# Altium PCB ESP-MONITOR_PCB.PcbDoc (part 2 of 2)
Units mm, origin at the board's own origin, x right, y up, seen from the top; angles counter-clockwise.
Board outline 62 x 40.01 mm, 2 copper layers (Top Layer, Bottom Layer); 71 components, 47 nets, 234 pads, 216 vias.
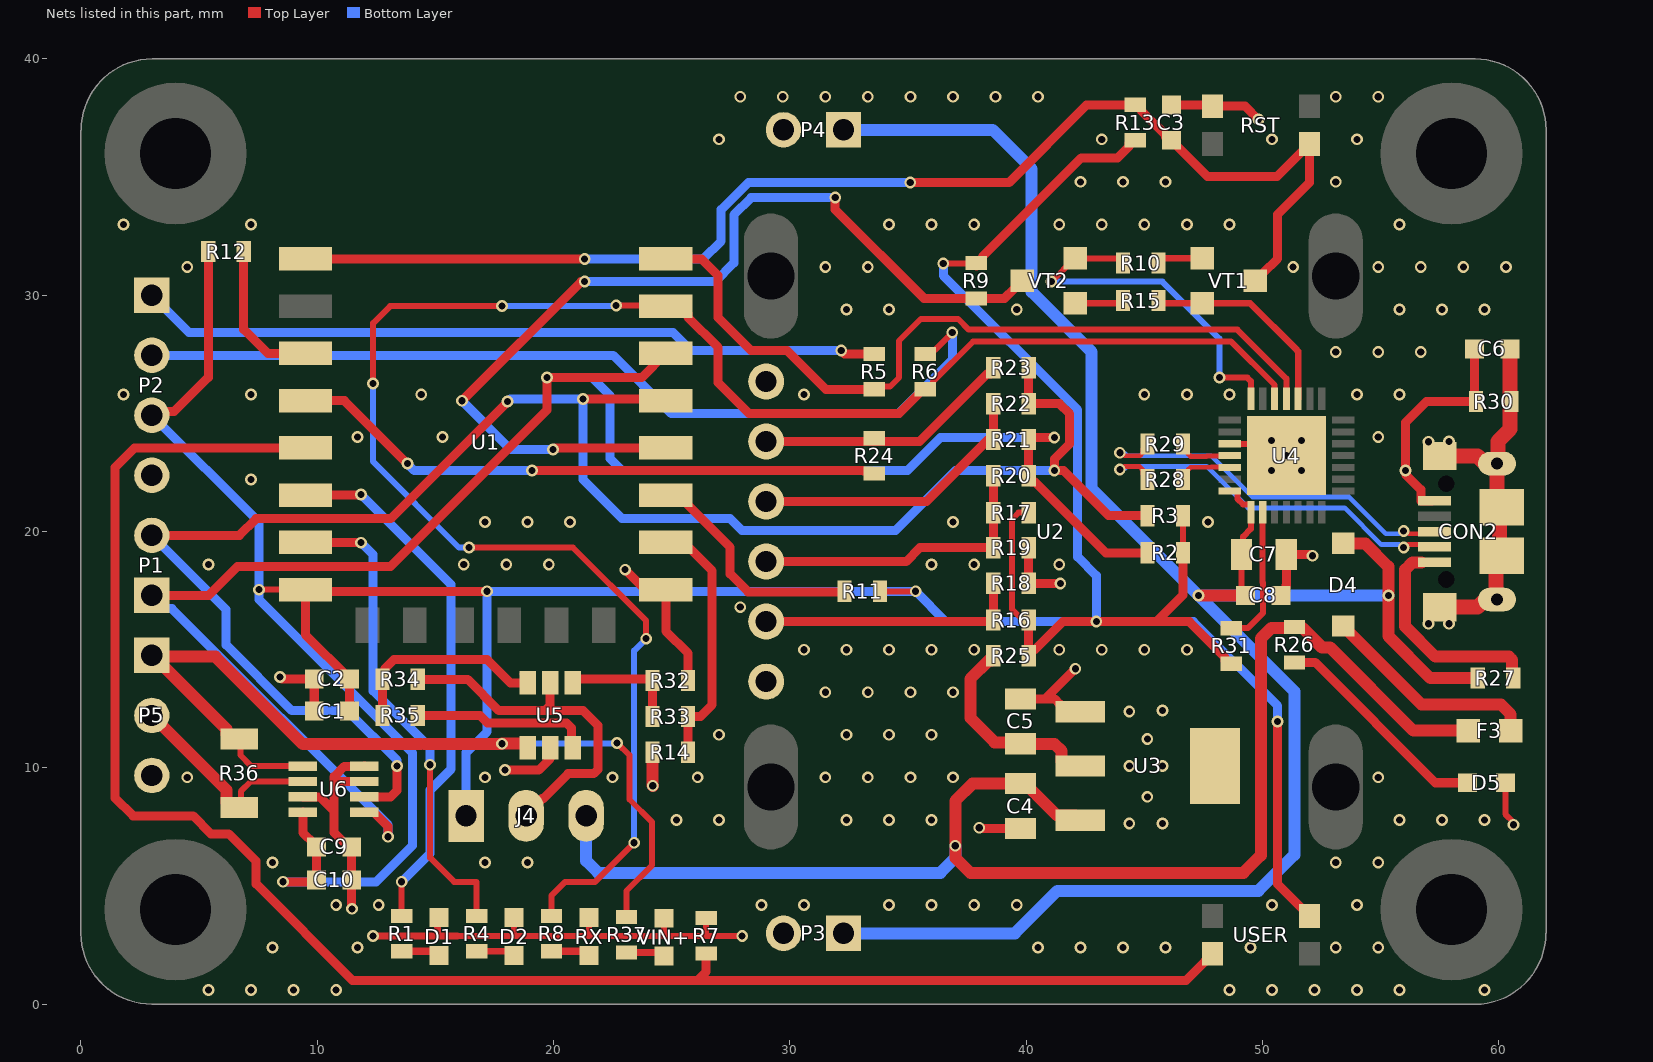
[diagram p2: the nets of this part, all layers, seen from the top]

## Part data (continued)
U5: "DIODES INC. - DMG6602SVT - MOSFET, NP CH, , 30V, 3.4, ATSOT23", Continuous Drain Current Id=3.4, Continuous Drain Current Id, P Channel=-2.8, Drain Source Voltage Vds=30, Drain Source Voltage Vds, P Channel=-30, Manufacturer="DIODES INC.", On Resistance Rds(on)=0.038, On Resistance Rds(on), P Channel=0.073, Operating Temperature Max=150, Operating Temperature Min=-55, Operating Temperature Range="-55°C to +150°C<!--FANDB--><div class=\"features-and-benefits-container\"><div class=\"features-and-benefits-description\"><span class=\"features-benefits-value\">The DMG6602SVT from Diode Inc is a surface mount complementary pair enhancement mode MOSFET in TSOT-26 package. This MOSFET features low input capacitance, fast switching speed and low input/output leakage, designed to minimize the onstate resistance and maintain superior switching performance, making it ideal for high efficiency power management applications and backlighting.</span></div><div class=\"features-and-benefits-list\"><ul class=\"features-and-benefits-list-list\"><li class=\"features-and-benefits-list-item\">Automotive grade AEC-Q101 qualified</li><li class=\"features-and-benefits-list-item\">UL recognized</li><li class=\"features-and-benefits-list-item\">Drain to source voltage (Vds) of 30V</li><li class=\"features-and-benefits-list-item\">Gate to source voltage (Vgs) of ±20V</li><li class=\"features-and-benefits-list-item\">Continuous drain current of 3.4A</li><li class=\"features-and-benefits-list-item\">Power dissipation (Pd) of 1.27W</li><li class=\"features-and-benefits-list-item\">Operating temperature range -55°C to 150°C</li><li class=\"features-and-benefits-list-item\">Low on state resistance of 38mohm at Vgs of 10", Power Dissipation Pd=1.12, Rds(on) Test Voltage Vgs=10, Supplier Part Number 1=2061522, Threshold Voltage Vgs=1, Transistor Case Style=TSOT-26, Automotive Qualification Standard=-, ComponentLink1Description=http://www.farnell.com/datasheets/1915929.pdf, ComponentLink1URL=http://www.farnell.com/datasheets/1915929.pdf, Continuous Drain Current Id, N Channel=3.4, Drain Source Voltage Vds, N Channel=30, Manufacturer Part Number=DMG6602SVT, Module Configuration=Dual, MSL=-, No. of Pins=6, On Resistance Rds(on), N Channel=0.038, Pricing 1="1=0.363, 25=0.339, 100=0.169, 250=0.166, 500=0.108, 1000=0.0809, 2000=0.0793, 6000=0.0777 (GBP)", Product Range=-, RoHS=YES, Stock 1=4881, Supplier 1=Farnell, SVHC="No SVHC (17-Dec-2015)", Transistor Polarity="N and P Channel"
U6: "26V, Bi-Directional, High-Side, I2C Out Current/Power Monitor 8-SOT-23 -40 to 125", Case/Package=SOT-23-8, Input Offset Voltage (Vos)=100uV, Manufacturer="Texas Instruments", Max Input Voltage=26V, Max Operating Temperature=125°C, Max Supply Current=5mA, Max Supply Voltage=5.5V, Min Input Voltage=0uV, Min Operating Temperature=-40°C, Min Supply Voltage=3V, Nominal Supply Current=700uA, Operating Supply Current=1mA, Output Current=10mA, Package Quantity=3000, Supplier Part Number 1=2295989, Accuracy=1%, Bandwidth=3.4MHz, Common Mode Rejection Ratio=100dB, ComponentLink1Description=http://www.ti.com/lit/ds/symlink/ina219.pdf?src-supplier=Farnell, ComponentLink1URL=http://www.ti.com/lit/ds/symlink/ina219.pdf?src-supplier=Farnell, ComponentLink2Description=http://www.ti.com/lit/ds/symlink/ina219.pdf?src-supplier=Digi-Key, ComponentLink2URL=http://www.ti.com/lit/ds/symlink/ina219.pdf?src-supplier=Digi-Key, ComponentLink3Description=http://www.farnell.com/datasheets/1725057.pdf?src-supplier=Element14, ComponentLink3URL=http://www.farnell.com/datasheets/1725057.pdf?src-supplier=Element14, ComponentLink4Description=http://www.ti.com/general/docs/lit/getliterature.tsp?genericPartNumber=INA219&&fileType=pdf&src-supplier=Element14, ComponentLink4URL=http://www.ti.com/general/docs/lit/getliterature.tsp?genericPartNumber=INA219&&fileType=pdf&src-supplier=Element14, ComponentLink5Description=http://www.ti.com/general/docs/lit/getliterature.tsp?genericPartNumber=INA219&&fileType=pdf&src-supplier=Avnet, ComponentLink5URL=http://www.ti.com/general/docs/lit/getliterature.tsp?genericPartNumber=INA219&&fileType=pdf&src-supplier=Avnet, ComponentLink6Description=https://www.verical.com/server-webapp/html/getDatasheet?partID=327029&src-supplier=Verical, ComponentLink6URL=https://www.verical.com/server-webapp/html/getDatasheet?partID=327029&src-supplier=Verical, ComponentLink7Description=https://octopart.com/click/track?ak=2673a2b2&ct=datasheets&sig=0ce0873&at=physicalpart&sid=370&ppid=8600986&hlid=24884001&src-supplier=TI+store, ComponentLink7URL=https://octopart.com/click/track?ak=2673a2b2&ct=datasheets&sig=0ce0873&at=physicalpart&sid=370&ppid=8600986&hlid=24884001&src-supplier=TI+store, ComponentLink8Description=http://datasheet.octopart.com/INA219AIDCNR-Texas-Instruments-datasheet-10258484.pdf?src-supplier=TI+store, ComponentLink8URL=http://datasheet.octopart.com/INA219AIDCNR-Texas-Instruments-datasheet-10258484.pdf?src-supplier=TI+store, ComponentLink9Description=http://datasheet.octopart.com/INA219AIDCNR-Texas-Instruments-datasheet-10383171.pdf?src-supplier=TI+store, ComponentLink9URL=http://datasheet.octopart.com/INA219AIDCNR-Texas-Instruments-datasheet-10383171.pdf?src-supplier=TI+store, ComponentLink10Description=http://sigma.octopart.com/49252122/technical_drawing/Texas-Instruments-INA219AIDCNR.pdf?src-supplier=TI+store, ComponentLink10URL=http://sigma.octopart.com/49252122/technical_drawing/Texas-Instruments-INA219AIDCNR.pdf?src-supplier=TI+store, ComponentLink11Description=http://datasheet.octopart.com/INA219AIDCNR-Texas-Instruments-datasheet-11538655.pdf?src-supplier=Future+Electronics, ComponentLink11URL=http://datasheet.octopart.com/INA219AIDCNR-Texas-Instruments-datasheet-11538655.pdf?src-supplier=Future+Electronics, ComponentLink12Description=http://datasheet.octopart.com/INA219AIDCNR-Texas-Instruments-datasheet-102489495.pdf?src-supplier=Farnell, ComponentLink12URL=http://datasheet.octopart.com/INA219AIDCNR-Texas-Instruments-datasheet-102489495.pdf?src-supplier=Farnell, ComponentLink13Description=http://datasheet.octopart.com/INA219AIDCNR-Texas-Instruments-datasheet-24897021.pdf?src-supplier=Element14, ComponentLink13URL=http://datasheet.octopart.com/INA219AIDCNR-Texas-Instruments-datasheet-24897021.pdf?src-supplier=Element14, ComponentLink14Description=http://datasheet.octopart.com/INA219AIDCNR-Texas-Instruments-datasheet-14155040.pdf?src-supplier=IIIC, ComponentLink14URL=http://datasheet.octopart.com/INA219AIDCNR-Texas-Instruments-datasheet-14155040.pdf?src-supplier=IIIC, ComponentLink15Description=http://datasheet.octopart.com/INA219AIDCNR.-Texas-Instruments-datasheet-62277359.pdf?src-supplier=Element14, ComponentLink15URL=http://datasheet.octopart.com/INA219AIDCNR.-Texas-Instruments-datasheet-62277359.pdf?src-supplier=Element14, Contact Plating=Gold, Features=I²C, Height=1.3mm, Lead Free="Lead Free", Length=3mm, Manufacturer Part Number=INA219AIDCNR, Number of Amplifiers=1, Number of Pins=8, Output Current per Channel=10mA, Output Type=Digital, Packaging="Tape and Reel", Pricing 1="1 = 1,75000, 25 = 1,54000, 50 = 1,39000, 100 = 1,23000, 250 = 1,16000, 500 = 1,08000, 1000 = 0,89900, 2500 = 0,80300 (EUR)", Quiescent Current=700uA, Radiation Hardening=No, REACH SVHC="No SVHC", Stock 1=13730, Supplier 1=Farnell, Weight=0.001411oz, Width=1.75mm
VT1 VT2: library part SMT_TRIODE_NPN, "Surface mount NPN transistor, package SOT-23"

## Free pads (board coordinates)
  round 6 hole 3: ""(4,4) ""(4,36) ""(58,4) ""(58,36)

## Via types
v1: diameter 0.5, hole 0.3, Top Layer to Bottom Layer, tented both sides, 211 vias
v2: diameter 0.5, hole 0.3, Top Layer to Bottom Layer, 5 vias

## Nets (pads, with @x,y where several pads share a name; then routed paths per layer and width w, separated by ;. In a path a pad name is that pad's centre, name@x,y a point inside that pad or via, vN(x,y) a via of type N, cw(c..) or ccw(c..) an arc to the next point about the centre after c; other vN are vias at no path point)
D_N: R28.1 U4.5 | length 2.3
  Top Layer w0.203: R28.1@46.64,22.202 46.839,22.401 46.839,22.605 46.958,22.724 47.817,22.724 47.83,22.737 48.589,22.737 U4.5@48.61,22.715
D_P: R29.1 U4.4 | length 2.3
  Top Layer w0.203: R29.1@46.64,23.702 46.839,23.504 46.839,23.3 46.958,23.181 47.628,23.181 47.641,23.194 48.589,23.194 U4.4@48.61,23.215
DUSB_N: CON2.2 R28.2 | length 16.8
  Top Layer w0.203: v1(43.963,22.632) 44.043,22.632 44.166,22.755 44.792,22.755 44.942,22.605 44.942,22.401 R28.2@45.14,22.202 ; R28.2@45.091,22.153 R28.2@45.091,22.173 ; v1@56.179,19.446 57.176,19.446 CON2.2@57.78,19.446
  Bottom Layer w0.203: v1(43.963,22.632) 44.02,22.689 44.202,22.689 44.268,22.755 47.636,22.755 49.391,21 53.475,21 55.029,19.446 55.773,19.446 55.896,19.323 v1(55.976,19.323)
  Bottom Layer w0.305: v1@55.976,19.35 v1@56.05,19.35
DUSB_P: CON2.3 R29.2 | length 16.6
  Top Layer w0.203: v1(43.963,23.335) 44.043,23.335 44.166,23.212 44.823,23.212 44.942,23.331 44.942,23.504 R29.2@45.14,23.702 ; v1@56.179,19.904 57.176,19.904 CON2.3@57.78,19.904
  Top Layer w0.381: R29.2@45.127,23.715 R29.2@45.14,23.702
  Bottom Layer w0.203: v1(43.963,23.335) 44.02,23.278 44.202,23.278 44.268,23.212 47.826,23.212 49.581,21.457 53.665,21.457 55.218,19.904 55.773,19.904 55.896,20.027 v1(55.976,20.027)
EN: R12.2 U1.3 | length 6.3
  Top Layer w0.381: R12.2@6.889,31.849 6.889,28.559 7.908,27.54 U1.3@9.5,27.54
FET_OUT: P5.1 R36.1 R37.2 U5.4 U6.1 | length 39.5
  Top Layer w0.254: R36.1@6.743,11.181 6.743,10.544 7.213,10.074 U6.1@9.39,10.074 ; 14.394,11.005 14.537,11.005 ; v1(22.681,11.053) 22.681,11.068 23.214,10.534 23.214,8.663 24.173,7.704 24.173,5.88 23.087,4.794 R37.2@23.087,3.685
  Top Layer w0.508: R36.1@6.698,11.226 6.348,11.226 6.152,11.422 6.152,11.643 3.091,14.704 5.687,14.704 9.386,11.005 14.394,11.005 ; 14.537,11.005 17.807,11.005 v1(17.823,11.021) 18.809,11.021 18.809,11.005 18.905,10.909 U5.4@18.905,10.845
  Bottom Layer w0.254: v1(17.823,11.021) 17.839,11.037 22.665,11.037 v1(22.681,11.053)
GND: C1.1 C2.1 C3.1 C4.1 C5.1 C6.1 C7.1 C8.1 C9.1 C10.1 CON2.5 D1.1 D2.1 D5.1 P2.4 P3.2 P4.2 P5.3 R7.1 R14.1 R18.1 R19.1 R30.1 R32.1 RST.4 RX.1 U1.15 U2.1 U2.6 U3.1 U4.3 U4.29 U5.5 U6.3 U6.7 U6.8 VIN+.1 | length 73.2
  Top Layer w0.254: 15.934,2.885 18.181,2.885 ; D2.1@18.33,3.66 18.324,3.654 18.324,3.028 18.181,2.885 ; 21.502,2.885 18.181,2.885 ; 21.502,2.922 RX.1@21.502,3.66 ; 21.633,2.885 24.673,2.885 ; VIN+.1@24.673,3.635 24.673,2.885 ; R7.1@26.459,3.643 26.459,2.885 ; v1(27.983,2.885) 26.459,2.885 ; U4.3@48.61,23.715 50.51,23.715 v2(51.01,23.215) ; D5.1@60.279,9.37 60.279,8.039 60.622,7.696 v1(60.622,7.592) ; 24.673,2.885 26.459,2.885
  Top Layer w0.3: v1(12.365,2.89) 14.169,2.89 14.174,2.885 14.982,2.885 ; D1.1@15.159,3.66 15.082,3.584 15.082,2.986 14.982,2.885 ; 15.934,2.885 14.982,2.885
  Top Layer w0.381: v1(8.425,13.844) 8.501,13.768 C2.1@9.873,13.768 C1.1@9.873,12.401 ; U6.3@9.39,8.774 10.097,8.774 10.711,8.16 ; C9.1@11.442,6.532 10.711,7.264 10.711,8.16 ; C9.1@11.459,6.659 C10.1@11.459,5.262 11.459,4.05 v1(11.473,4.036) ; U6.7@11.981,9.414 U6.7@11.99,9.424 10.765,9.424 10.711,9.37 ; U6.8@11.99,10.074 11.982,10.065 11.152,10.065 10.711,9.624 10.711,9.37 ; v1(17.95,9.903) 19.372,9.903 19.855,10.386 U5.5@19.855,10.845 ; v1(23.03,18.387) 23.877,17.54 U1.15@24.75,17.54 24.75,15.789 25.69,14.849 R32.1@25.69,13.694 ; v1(38.016,7.465) 38.046,7.435 C4.1@39.763,7.435 ; C5.1@39.763,12.918 40.802,12.918 ; R19.1@40.108,19.318 R18.1@40.108,17.807 v1(41.445,17.807) ; v1(42.08,14.196) 40.802,12.918 ; U3.1@42.289,12.38 41.689,12.38 41.43,12.639 41.43,12.695 41.207,12.918 40.802,12.918 ; C3.1@46.144,38.06 47.826,38.06 RST.4@47.886,38 49.264,38 v1(49.827,37.437) ; C8.1@50.786,17.3 50.995,17.51 50.995,17.717 51.011,17.733 C7.1@51.011,19.032 52.056,19.032 v1(52.113,18.975) ; CON2.5@57.176,21.3 56.713,21.3 56.703,21.31 56.703,21.773 56.073,22.403 56.073,22.555 v1(56.05,22.578) 56.05,24.61 56.94,25.5 R30.1@59.04,25.5 58.977,25.564 C6.1@58.977,27.728 ; 10.711,8.16 10.711,9.37
  Top Layer w0.508: R14.1@24.19,10.665 24.19,9.251 v1(24.198,9.243)
  other v1: 5.4,0.6 7.2,0.6 9,0.6 10.8,0.6 48.6,0.6 50.4,0.6 52.2,0.6 54,0.6 55.8,0.6 59.4,0.6 8.1,2.4 11.7,2.4 40.5,2.4 42.3,2.4 44.1,2.4 45.9,2.4 49.5,2.4 53.1,2.4 54.9,2.4 10.8,4.2 12.6,4.2 28.8,4.2 30.6,4.2 34.2,4.2 36,4.2 37.8,4.2 39.6,4.2 50.4,4.2 54,4.2 8.1,6 17.1,6 18.9,6 53.1,6 54.9,6 25.2,7.8 27,7.8 32.4,7.8 34.2,7.8 36,7.8 55.8,7.8 57.6,7.8 59.4,7.8 4.5,9.6 17.1,9.6 22.5,9.6 26.1,9.6 31.5,9.6 33.3,9.6 35.1,9.6 36.9,9.6 54.9,9.6 27,11.4 32.4,11.4 34.2,11.4 36,11.4 31.5,13.2 33.3,13.2 35.1,13.2 36.9,13.2 30.6,15 32.4,15 34.2,15 36,15 37.8,15 41.4,15 43.2,15 45,15 46.8,15 27.9,16.8 5.4,18.6 16.2,18.6 18,18.6 19.8,18.6 36,18.6 37.8,18.6 41.4,18.6 17.1,20.4 18.9,20.4 20.7,20.4 36.9,20.4 47.7,20.4 7.2,22.2 11.7,24 15.3,24 54.9,24 1.8,25.8 7.2,25.8 14.4,25.8 30.6,25.8 45,25.8 46.8,25.8 48.6,25.8 54,25.8 55.8,25.8 53.1,27.6 54.9,27.6 56.7,27.6 32.4,29.4 34.2,29.4 39.6,29.4 55.8,29.4 57.6,29.4 59.4,29.4 4.5,31.2 31.5,31.2 33.3,31.2 51.3,31.2 54.9,31.2 56.7,31.2 58.5,31.2 60.3,31.2 1.8,33 7.2,33 34.2,33 36,33 37.8,33 41.4,33 43.2,33 45,33 46.8,33 48.6,33 55.8,33 42.3,34.8 44.1,34.8 45.9,34.8 53.1,34.8 27,36.6 43.2,36.6 50.4,36.6 54,36.6 27.9,38.4 29.7,38.4 31.5,38.4 33.3,38.4 35.1,38.4 36.9,38.4 38.7,38.4 40.5,38.4 53.1,38.4 54.9,38.4
  other v2: 50.375,22.58 51.645,22.58 50.375,23.85 51.645,23.85
GPIO0: R9.2 U1.18 VT2.3 | length 41
  Top Layer w0.381: v1(16.125,25.535) 21.169,30.579 v1(21.316,30.579) ; v1(19.982,23.467) 20.055,23.54 U1.18@24.75,23.54 U1.18@25.431,23.54 ; v1(31.92,34.135) 31.92,33.627 35.684,29.863 R9.2@37.889,29.863 39.078,29.863 39.519,30.303 39.519,30.328 39.803,30.613 VT2.3@39.828,30.613
  Bottom Layer w0.381: v1(16.125,25.535) 18.193,23.467 v1(19.982,23.467) ; v1(21.316,30.579) 26.84,30.579 27.629,31.368 27.629,33.399 28.364,34.135 v1(31.92,34.135)
GPIO2: R11.2 U1.17 | length 9.9
  Top Layer w0.381: U1.17@24.75,21.54 25.06,21.23 25.571,21.23 27.475,19.327 27.475,18.209 28.237,17.447 R11.2@32.25,17.447
GPIO12: R1.1 U1.6 | length 22.6
  Top Layer w0.254: R1.1@13.573,3.737 v1(13.573,5.179)
  Top Layer w0.381: U1.6@9.5,21.54 11.832,21.54 v1(11.854,21.562)
  Bottom Layer w0.381: v1(11.854,21.562) 15.664,17.752 15.664,9.952 14.775,9.063 14.775,6.381 v1(13.573,5.179)
GPIO13: R4.1 U1.7 | length 20.7
  Top Layer w0.254: v1(14.775,10.132) 14.775,6.195 15.791,5.179 16.744,5.179 R4.1@16.744,3.737
  Top Layer w0.381: U1.7@9.5,19.54 9.51,19.53 v1(11.854,19.53)
  Bottom Layer w0.381: v1(11.854,19.53) 12.365,19.019 12.365,13.257 14.775,10.847 v1(14.775,10.132)
GPIO14: R7.2 U1.5 USER.1 | length 74.4
  Top Layer w0.381: U1.5@9.5,23.54 2.275,23.54 1.44,22.705 1.44,8.735 2.207,7.968 4.742,7.968 5.499,7.211 6.254,7.211 7.409,6.056 7.409,5.092 11.501,1 26.078,1 ; R7.2@26.459,2.143 26.459,1.381 26.078,1 ; USER.1@47.886,2.131 47.886,2.081 47.626,1.821 47.576,1.821 46.755,1 26.078,1
GPIO15: R14.2 R33.1 U1.16 | length 10.9
  Top Layer w0.381: U1.16@24.75,19.54 25.509,19.54 26.713,18.336 26.713,12.672 26.211,12.17 R33.1@25.69,12.17 R14.2@25.69,10.665
NetC5_2: C5.2 R25.1 U3.2 | length 8.9
  Top Layer w0.508: R25.1@38.608,14.741 38.608,14.591 38.562,14.545 38.412,14.545 37.635,13.768 37.635,12.115 38.667,11.084 39.698,11.084 C5.2@39.763,11.018 41.196,11.018 41.493,10.721 41.493,10.276 41.689,10.08 U3.2@42.289,10.08
  other v1: 44.366,7.648 45.763,7.648 45.127,8.774 44.366,10.08 45.763,10.08 45.127,11.226 44.366,12.38 45.763,12.424
NetC6_2: C6.2 CON2.6 CON2.7 CON2.8 CON2.9 CON2.10 CON2.11 R30.2 | length 16.3
  Top Layer w0.635: CON2.6@57.401,16.8 59.102,16.8 59.427,17.125 59.826,17.125 59.889,17.189 59.889,18.838 60.026,18.975 60.026,21.025 59.926,21.125 CON2.9@59.926,22.775 ; CON2.7@57.401,23.2 59.102,23.2 59.527,22.775 CON2.9@59.926,22.775 ; C6.2@60.477,27.728 60.477,25.5 60.477,24.33 59.966,23.819 59.966,23.015 59.826,22.875 CON2.9@59.926,22.775
  other v1: 57.022,16.1 57.9,16.1 57.022,23.8 57.9,23.81
NetCON2_1: CON2.1 R27.2 | length 9.1
  Top Layer w0.508: CON2.1@56.73,18.693 56.346,18.693 56.037,18.384 56.037,15.985 57.318,14.704 58.617,14.704 58.621,14.707 60.424,14.707 60.424,14.704 60.564,14.564 60.564,13.846 R27.2@60.61,13.8
NetD1_2: D1.2 R1.2 | length 1.7
  Top Layer w0.305: R1.2@13.573,2.237 14.982,2.237 D1.2@15.159,2.06
NetD2_2: D2.2 R4.2 | length 1.7
  Top Layer w0.279: R4.2@16.744,2.237 18.153,2.237 D2.2@18.33,2.06
NetD4_1: D4.1 F3.1 | length 9.3
  Top Layer w0.508: D4.1@53.41,16.002 53.435,16.002 53.631,15.806 53.631,15.781 56.74,12.672 60.097,12.672 60.506,12.264 F3.1@60.506,11.578
NetD5_2: D5.2 R26.1 | length 9.4
  Top Layer w0.381: R26.1@51.351,14.462 52.228,14.462 57.32,9.37 D5.2@58.679,9.37
NetJ4_2: J4.2 R34.1 U5.2 | length 15.4
  Top Layer w0.381: R34.1@14.255,13.746 16.368,13.746 17.69,12.424 19.632,12.424 ; J4.2@18.839,7.973 18.839,8.02 19.52,8.701 19.567,8.701 20.617,9.751 21.7,9.751 21.887,9.938 21.887,11.792 21.254,12.424 19.632,12.424 ; U5.2@19.855,13.595 19.855,12.647 19.632,12.424
NetP2_1: P2.1 R5.2 | length 31.8
  Top Layer w0.381: v1@32.313,27.519 v1(32.174,27.658) 32.206,27.658 32.345,27.519 R5.2@33.571,27.519
  Bottom Layer w0.381: P2.1@3,30 4.58,28.42 25.062,28.42 25.824,27.658 v1(32.174,27.658)
NetP2_2: P2.2 R6.2 | length 38.5
  Top Layer w0.254: R6.2@35.73,27.519 35.903,27.692 36.145,27.692 v1(36.873,28.42)
  Bottom Layer w0.381: P2.2@3,27.46 22.522,27.46 24.991,24.991 34.587,24.991 36.873,27.277 v1(36.873,28.42)
NetP5_2: P5.2 R36.2 U6.2 | length 9.1
  Top Layer w0.254: R36.2@6.698,8.326 6.762,8.391 6.762,9.009 7.178,9.424 U6.2@9.39,9.424
  Top Layer w0.508: P5.2@3,12.22 6.152,9.068 6.152,8.522 6.348,8.326 R36.2@6.698,8.326
NetR8_1: R8.1 RX.2 | length 1.7
  Top Layer w0.305: R8.1@19.916,2.237 RX.2@21.325,2.237
  Top Layer w0.381: RX.2@21.325,2.237 RX.2@21.502,2.06
NetR10_1: R10.1 VT1.1 | length 2
  Top Layer w0.279: R10.1@45.599,31.365 45.599,31.402 45.76,31.563 VT1.1@47.449,31.563
NetR10_2: R10.2 U4.28 VT2.2 | length 15.4
  Top Layer w0.254: v1(41.064,30.579) 41.07,30.579 42.053,31.563 VT2.2@42.078,31.563 43.926,31.563 44.099,31.39 R10.2@44.099,31.365 ; v1(48.176,26.515) 49.36,26.515 49.51,26.365 U4.28@49.51,25.615
  Bottom Layer w0.254: v1(41.064,30.579) 45.763,30.579 48.176,28.166 v1(48.176,26.515)
NetR15_1: R15.1 VT2.1 | length 2.1
  Top Layer w0.279: VT2.1@42.078,29.663 43.988,29.663 R15.1@44.099,29.774
NetR15_2: R15.2 U4.24 VT1.2 | length 8.8
  Top Layer w0.279: R15.2@45.599,29.774 45.71,29.663 VT1.2@47.449,29.663 49.473,29.663 51.414,27.721 51.51,27.626 U4.24@51.51,25.615
NetR16_2: R16.2 R18.2 U2.2 | length 11.2
  Top Layer w0.381: U2.2@29,16.19 38.542,16.19 R16.2@38.608,16.256 R18.2@38.608,17.807
NetR17_2: R17.2 R19.2 R20.2 U2.3 | length 12.9
  Top Layer w0.381: U2.3@29,18.73 34.918,18.73 35.506,19.318 R19.2@38.608,19.318 R17.2@38.608,20.8 R20.2@38.608,22.363
NetR21_2: R21.2 R22.2 U2.4 | length 12.2
  Top Layer w0.381: U2.4@29,21.27 35.776,21.27 38.402,23.896 R21.2@38.608,23.896 R22.2@38.608,25.411
NetR23_2: R23.2 R24.2 U2.5 | length 11.3
  Top Layer w0.381: U2.5@29,23.81 33.571,23.81 35.483,23.81 38.349,26.676 38.499,26.676 38.608,26.785 R23.2@38.608,26.935 38.608,27.085 R23.2@38.718,27.195
NetR31_2: R31.2 U4.9 | length 5.9
  Top Layer w0.254: R31.2@48.684,15.908 49.38,15.908 50.016,16.544 50.016,17.837 50.01,17.842 U4.9@50.01,20.815
NetR32_2: R32.2 R33.2 U5.1 | length 4.9
  Top Layer w0.381: U5.1@20.805,13.755 24.13,13.755 R32.2@24.19,13.694 R33.2@24.19,12.17
NetR34_2: R34.2 R35.2 U5.3 | length 9.1
  Top Layer w0.279: U5.3@18.695,13.955 18.905,13.745 U5.3@18.905,13.595
  Top Layer w0.381: R35.2@12.755,12.22 R34.2@12.755,13.746 12.864,13.856 12.864,14.202 13.252,14.59 17.175,14.59 18.17,13.595 U5.3@18.905,13.595
NetR35_1: R35.1 U5.6 | length 7.6
  Top Layer w0.381: R35.1@14.255,12.22 16.878,12.22 17.207,11.891 20.557,11.891 20.756,11.692 20.756,10.894 U5.6@20.805,10.845
NetR37_1: R37.1 VIN+.2 | length 1.6
  Top Layer w0.279: R37.1@23.087,2.185 24.523,2.185 VIN+.2@24.673,2.035
nRST: C3.2 R13.2 RST.2 U1.1 VT1.3 | length 54.2
  Top Layer w0.381: U1.1@9.5,31.54 v1(21.316,31.54) ; v1(35.095,34.77) 39.273,34.77 42.563,38.06 R13.2@44.62,38.06 ; R13.2@44.88,37.8 45.896,36.784 45.896,36.706 C3.2@46.106,36.496 ; C3.2@46.144,36.56 47.68,35.024 50.61,35.024 51.676,36.09 51.726,36.09 RST.2@51.986,36.35 ; VT1.3@49.699,30.613 49.724,30.613 50.008,30.897 50.008,30.922 50.638,31.552 50.638,33.422 51.986,34.77 RST.2@51.986,36.35 ; RST.2@51.986,36.4 RST.2@51.986,36.35
  Bottom Layer w0.381: v1(21.316,31.54) 26.341,31.54 27.095,32.294 27.095,33.62 28.254,34.779 35.086,34.779 v1(35.095,34.77)
RES: R24.1 U1.4 | length 25.4
  Top Layer w0.381: U1.4@9.5,25.54 11.148,25.54 v1(13.813,22.875) ; v1(19.093,22.58) 23.536,22.58 23.538,22.578 33.088,22.578 33.106,22.56 33.462,22.56 R24.1@33.571,22.451
  Bottom Layer w0.381: v1(13.813,22.875) 14.107,22.58 v1(19.093,22.58)
RXD0: R6.1 R8.2 U1.21 U4.26 | length 78.9
  Top Layer w0.254: v1(12.365,26.261) 12.365,28.821 13.084,29.54 v1(17.823,29.54) ; v1(16.42,19.327) 20.82,19.327 23.919,16.228 v1(23.919,15.466) ; R8.2@19.916,3.737 19.916,4.605 20.49,5.179 21.76,5.179 v1(23.411,6.83) ; v1(22.649,29.563) 24.727,29.563 U1.21@24.75,29.54 ; R6.1@35.73,26.019 35.88,26.019 36.053,26.192 36.053,26.342 37.75,28.039 48.678,28.039 50.51,26.207 U4.26@50.51,25.615
  Top Layer w0.381: U1.21@24.75,29.54 25.375,29.54 25.685,29.23 25.685,29.074 26.967,27.791 26.967,26.302 28.278,24.991 34.617,24.991 R6.1@35.527,25.901
  Bottom Layer w0.254: v1(12.365,26.261) 12.362,26.258 12.362,22.959 15.994,19.327 v1(16.42,19.327) ; v1(17.823,29.54) 22.626,29.54 v1(22.649,29.563) ; v1(23.411,6.83) 23.411,14.958 v1(23.919,15.466)
SCL: P1.1 R2.1 R20.1 R21.1 U1.20 U6.5 | length 77.4
  Top Layer w0.381: P1.1@3,17.3 5.402,17.3 6.616,18.514 13.094,18.514 19.728,25.148 v1(19.728,26.515) 23.725,26.515 U1.20@24.75,27.54 ; U6.5@11.99,8.124 12.39,8.124 12.997,7.517 v1(12.997,7.084) ; v1(41.191,23.975) 40.279,23.975 40.154,23.85 R21.1@40.108,23.896 R20.1@40.108,22.363 40.108,22.213 40.218,22.104 40.368,22.104 43.37,19.102 R2.1@45.14,19.102
  Bottom Layer w0.381: P1.1@3,17.3 3.56,16.741 3.848,16.741 12.997,7.592 v1(12.997,7.084) ; v1(19.728,26.515) 21.633,26.515 22.395,25.753 22.395,23.088 22.903,22.58 34.97,22.58 36.365,23.975 v1(41.191,23.975)
SDA: P1.2 R3.1 R22.1 R23.1 U1.19 U6.6 | length 78.2
  Top Layer w0.381: P1.2@3,19.84 6.703,19.84 7.409,20.546 13.101,20.546 v1(18.054,25.499) ; U6.6@11.99,8.774 13.107,8.774 13.378,9.045 v1(13.378,10.08) ; v1(21.252,25.615) 24.675,25.615 U1.19@24.75,25.54 ; R23.1@40.108,26.935 R22.1@40.108,25.411 41.406,25.411 41.835,24.982 41.835,23.708 41.191,23.065 v1(41.191,22.578) 41.587,22.578 43.492,20.673 R3.1@45.14,20.673
  Bottom Layer w0.381: P1.2@3,19.84 6.139,16.701 6.139,15.204 8.925,12.418 11.275,12.418 13.378,10.315 v1(13.378,10.08) ; v1@18.095,25.54 18.17,25.615 v1(21.252,25.615) 21.252,22.197 22.903,20.546 27.475,20.546 27.983,20.038 34.46,20.038 37,22.578 v1(41.191,22.578)
TXD0: R5.1 U1.22 U4.25 | length 33.6
  Top Layer w0.254: R5.1@33.571,26.019 33.686,26.134 34.236,26.134 34.617,26.515 34.617,28.069 35.548,29 37.113,29 37.567,28.547 48.938,28.547 51.01,26.475 U4.25@51.01,25.615
  Top Layer w0.381: U1.22@24.75,31.54 26.26,31.54 26.967,30.833 26.967,29.055 28.364,27.658 29.888,27.658 31.527,26.019 R5.1@33.571,26.019
VDD3V3: C1.2 C2.2 C9.2 C10.2 J4.1 P2.3 R2.2 R3.2 R9.1 R11.1 R12.1 R13.1 R16.1 R17.1 R25.2 R31.1 U1.8 U6.4 USER.3 | length 163.6
  Top Layer w0.254: v1(7.536,17.54) U1.8@9.5,17.54 ; R11.1@33.813,17.473 v1(35.324,17.473) ; v1(36.492,31.341) R9.1@37.686,31.341 ; R16.1@39.958,16.256 39.863,16.256 39.399,16.72 39.399,20.524 39.675,20.8 R17.1@40.108,20.8 ; R2.2@46.64,19.102 R3.2@46.64,20.673
  Top Layer w0.381: P2.3@3,24.92 3.162,25.082 3.944,25.082 5.389,26.527 R12.1@5.389,31.849 ; v1(8.552,5.179) 9.877,5.179 C10.2@9.959,5.262 9.959,6.463 9.863,6.559 9.863,6.789 9.39,7.262 U6.4@9.39,8.124 ; C1.2@11.373,12.401 C2.2@11.373,13.768 9.5,15.641 U1.8@9.5,17.54 9.567,17.473 v1(17.188,17.473) ; R9.1@37.889,31.236 R9.1@37.889,31.274 ; R9.1@37.889,31.363 38.039,31.363 38.149,31.472 38.149,31.622 42.336,35.81 43.87,35.81 44.36,36.3 44.36,36.451 44.47,36.56 R13.1@44.62,36.56 ; R25.2@40.108,14.741 R25.2@40.108,14.891 ; R16.1@40.108,16.256 R25.2@40.108,14.891 ; R2.2@46.64,19.102 46.64,17.321 45.509,16.19 ; R31.1@48.684,14.408 48.534,14.408 48.424,14.518 48.424,14.668 46.902,16.19 45.509,16.19 ; v1(50.638,11.959) 50.638,5.079 51.676,4.041 51.726,4.041 51.986,3.781 USER.3@51.986,3.731 ; R25.2@40.108,14.891 40.218,15.001 40.368,15.001 41.557,16.19 v1(42.969,16.19) 45.509,16.19
  Bottom Layer w0.381: P2.3@3,24.92 7.536,20.384 v1(7.536,17.54) 7.536,17.117 14.022,10.631 14.022,6.712 12.489,5.179 v1(8.552,5.179) ; J4.1@16.299,7.973 16.299,10.64 17.188,11.529 v1(17.188,17.473) v1(35.324,17.473) 36.606,16.19 v1(42.969,16.19) ; v1(36.492,31.341) 36.492,30.833 42.178,25.147 42.178,18.924 42.969,18.133 v1(42.969,16.19) ; v1(50.638,11.959) 50.638,12.623 47.071,16.19 v1(42.969,16.19)
VDD5V: C4.2 F3.2 J4.3 R26.2 U3.3 | length 60.6
  Top Layer w0.508: U3.3@42.289,7.78 42.093,7.976 41.322,7.976 39.963,9.335 C4.2@39.763,9.335 37.727,9.335 37,8.608 v1(37,6.703) 37,6.195 37.635,5.56 49.192,5.56 49.931,6.299 49.931,15.472 50.375,15.916 51.305,15.916 R26.2@51.351,15.962 51.397,15.916 51.7,15.916 52.522,15.095 52.865,15.095 56.382,11.578 F3.2@58.706,11.578
  Bottom Layer w0.508: J4.3@21.379,7.973 21.379,6.068 21.887,5.56 36.365,5.56 37,6.195 v1(37,6.703)
VDDUSB: C7.2 C8.2 D4.2 P3.1 P4.1 R27.1 U4.7 U4.8 | length 88
  Top Layer w0.254: U4.7@48.61,21.715 48.915,21.715 48.938,21.692 48.938,21.387 49.182,21.143 49.487,21.143 49.51,21.12 U4.8@49.51,20.815 49.51,20.112 49.182,19.784 49.182,19.103 C7.2@49.111,19.032 49.111,17.5 C8.2@49.311,17.3
  Top Layer w0.508: v1(47.287,17.3) C8.2@49.286,17.3 ; D4.2@53.41,19.502 53.418,19.494 54.35,19.494 55.33,18.514 v1(55.33,17.3) 55.33,15.578 57.108,13.8 R27.1@59.11,13.8
  Bottom Layer w0.508: P3.1@32.27,3 39.52,3 41.318,4.798 49.827,4.798 51.351,6.322 51.351,13.236 v1(47.287,17.3) ; P4.1@32.27,37 38.58,37 40.23,35.35 40.23,30.143 42.775,27.598 42.775,21.812 v1(47.287,17.3) ; v1(55.33,17.3) v1(47.287,17.3)
pads on no net: CON2. CON2.4 RST.1 RST.3 U1.2 U1.9 U1.10 U1.11 U1.12 U1.13 U1.14 U2. U4.1 U4.2 U4.6 U4.10 U4.11 U4.12 U4.13 U4.14 U4.15 U4.16 U4.17 U4.18 U4.19 U4.20 U4.21 U4.22 U4.23 U4.27 USER.2 USER.4

## Polygon pours and split planes (outlines as drawn)
GND on Bottom Layer "Bottom Layer-GND" (solid, pour order 10): 0,37.818 0.297,38.115 0.297,38.496 1.313,39.512 1.44,39.512 1.821,39.893 2.329,39.893 2.479,40.043 59.71,40.043 59.987,39.766 60.368,39.766 60.749,39.385 61.003,39.385 61.003,39.258 61.638,38.623 61.638,38.297 61.892,38.043 61.892,37.461 62,37.353 62,2.818 61.892,2.71 61.892,2.047 61.638,1.793 61.638,1.539 61.13,1.031 61.13,0.904 61.003,0.904 60.368,0.269 59.832,0.269 59.578,0.015 58.844,0.015 58.844,0.043 2.428,0.043 2.329,0.142 1.948,0.142 1.567,0.523 1.313,0.523 0.805,1.031 0.678,1.031 0.678,1.158 0.297,1.539 0.297,1.793 0.17,1.92 0.17,2.174 0,2.344
NetC5_2 on Bottom Layer "Bottom Layer-NetC5_2" (solid, pour order 4): 43.35,13.561 47.668,13.561 47.668,6.576 43.35,6.576
GND on Top Layer "GND_L01_P012" (solid, pour order 12): 0,37.818 0.297,38.115 0.297,38.496 1.313,39.512 1.44,39.512 1.821,39.893 2.329,39.893 2.479,40.043 59.71,40.043 59.987,39.766 60.368,39.766 60.749,39.385 61.003,39.385 61.003,39.258 61.638,38.623 61.638,38.297 61.892,38.043 61.892,37.461 62,37.353 62,2.818 61.892,2.71 61.892,2.047 61.638,1.793 61.638,1.539 61.13,1.031 61.13,0.904 61.003,0.904 60.368,0.269 59.832,0.269 59.578,0.015 58.844,0.015 58.844,0.043 2.428,0.043 2.329,0.142 1.948,0.142 1.567,0.523 1.313,0.523 0.805,1.031 0.678,1.031 0.678,1.158 0.297,1.539 0.297,1.793 0.17,1.92 0.17,2.174 0,2.344
NetC5_2 on Top Layer "Top Layer-NetC5_2" (solid, pour order 0): 49.192,13.561 49.192,6.576 42.715,6.576 42.715,13.561

## Keep-outs
Keep-Out Layer:
  the board outline again, w0.1

## Other copper
Top Layer:
  pour cut-out: 7.964,39.742 7.964,32.357 26.285,32.357 26.285,39.742
  region net VDD3V3: 44.468,39.122
Bottom Layer:
  pour cut-out: 7.964,39.742 7.964,32.357 26.285,32.357 26.285,39.742

## Silkscreen, mask and mechanical layers (free items; w line width, h text height)
Top Overlay:
  text "Irnas.eu" at 33.54,38.453 h0.8
  text "ESP-MONITOR" at 33.54,37 h0.8
  text ".Version" at 33.54,35.73 h0.8
  text "TX" at 4.742,29.563 h0.8
  text "RX" at 4.742,27.023 h0.8
  text "3V3" at 4.742,24.483 h0.8
  text "GND" at 4.742,21.943 h0.8
  text "SDA" at 4.742,19.403 h0.8
  text "SCL" at 4.742,16.863 h0.8
  text "IN" at 4.615,15.212 h0.8 r270
  text "OUT" at 4.488,13.18 h0.8 r270
  text "GND" at 4.488,10.386 h0.8 r270
  text "5V" at 20.617,9.751 h0.8
  text "3V3" at 15.029,9.68 h0.8
  text "JMP" at 14.595,6.957 h0.8 r90
  text "JMP LEFT: 3V3" at 34.206,4.036 h0.8
  text "JMP RIGHT: 5V" at 34.206,2.766 h0.8
  text "NO JMP: EXT PWR" at 34.206,1.538 h0.8
Mechanical 1:
  lines w0.2: -10,0 3,0 ; -10,40 3.01,40
  lines w0.254: -10.508,1.524 -10,0 ; -10.508,38.476 -10,40 ; -10.254,0 -9.746,0 ; -10.254,40 -9.746,40 ; -10,14.896 -10,0 ; -10,25.104 -10,40 ; -9.492,1.524 -10,0 ; -9.492,38.476 -10,40 ; 0,36.99 0,3 ccw(c3,3) 3,0 59,0 ; 0.01,37 cw(c3.01,37) 3.01,40 59,40 cw(c59,37) 62,37 62,3.007 ; 58.991,-0.009 ccw(c58.974,3.007) 61.991,3.007
  text "40 (mm)" at -9.086,15.15 h1.52 r90
ASM TOP:
  lines w0.2: 58.995,-0.005 58.991,0 ; 58.991,0 ccw(c58.995,3.005) 62,3 62,36.98 ccw(c58.99,36.99) 59,40 3,40 ccw(c3.005,37) 0.005,36.995 0.005,3.005 0,3 ccw(c3,3) 3,0 58.991,0
  text "Assembly Drawing TOP" at 8,43 h2.5

## Dimensions
0,3 to 62,3.007 on Mechanical 1

## Text inside footprints (layer, text, board x,y; h text height)
U1: Mechanical 13 "CUTOUT POLYGON" at 9.252,38.906 h0.25; Mechanical 13 "ANTENNA AREA" at 9.252,39.414 h0.25
U2: Top Overlay "GND" at 32.364,14.063 h0.8 r180; Top Overlay "VCC" at 32.364,16.613 h0.8 r180; Top Overlay "SCL" at 32.364,19.163 h0.8 r180; Top Overlay "SDA" at 32.364,21.713 h0.8 r180; Top Overlay "RES" at 32.364,24.263 h0.8 r180; Top Overlay "DC" at 32.364,26.813 h0.8 r180